# Altium PCB 23972修改.PcbDoc (part 1 of 2)
Units mil, origin at the board's own origin, x right, y up, seen from the top; angles counter-clockwise.
Board outline 7085.81 x 4390 mil, 3 copper layers (Top Layer, Mid-Layer 1, Bottom Layer); 28 components, 107 nets, 1198 pads, 224 vias.
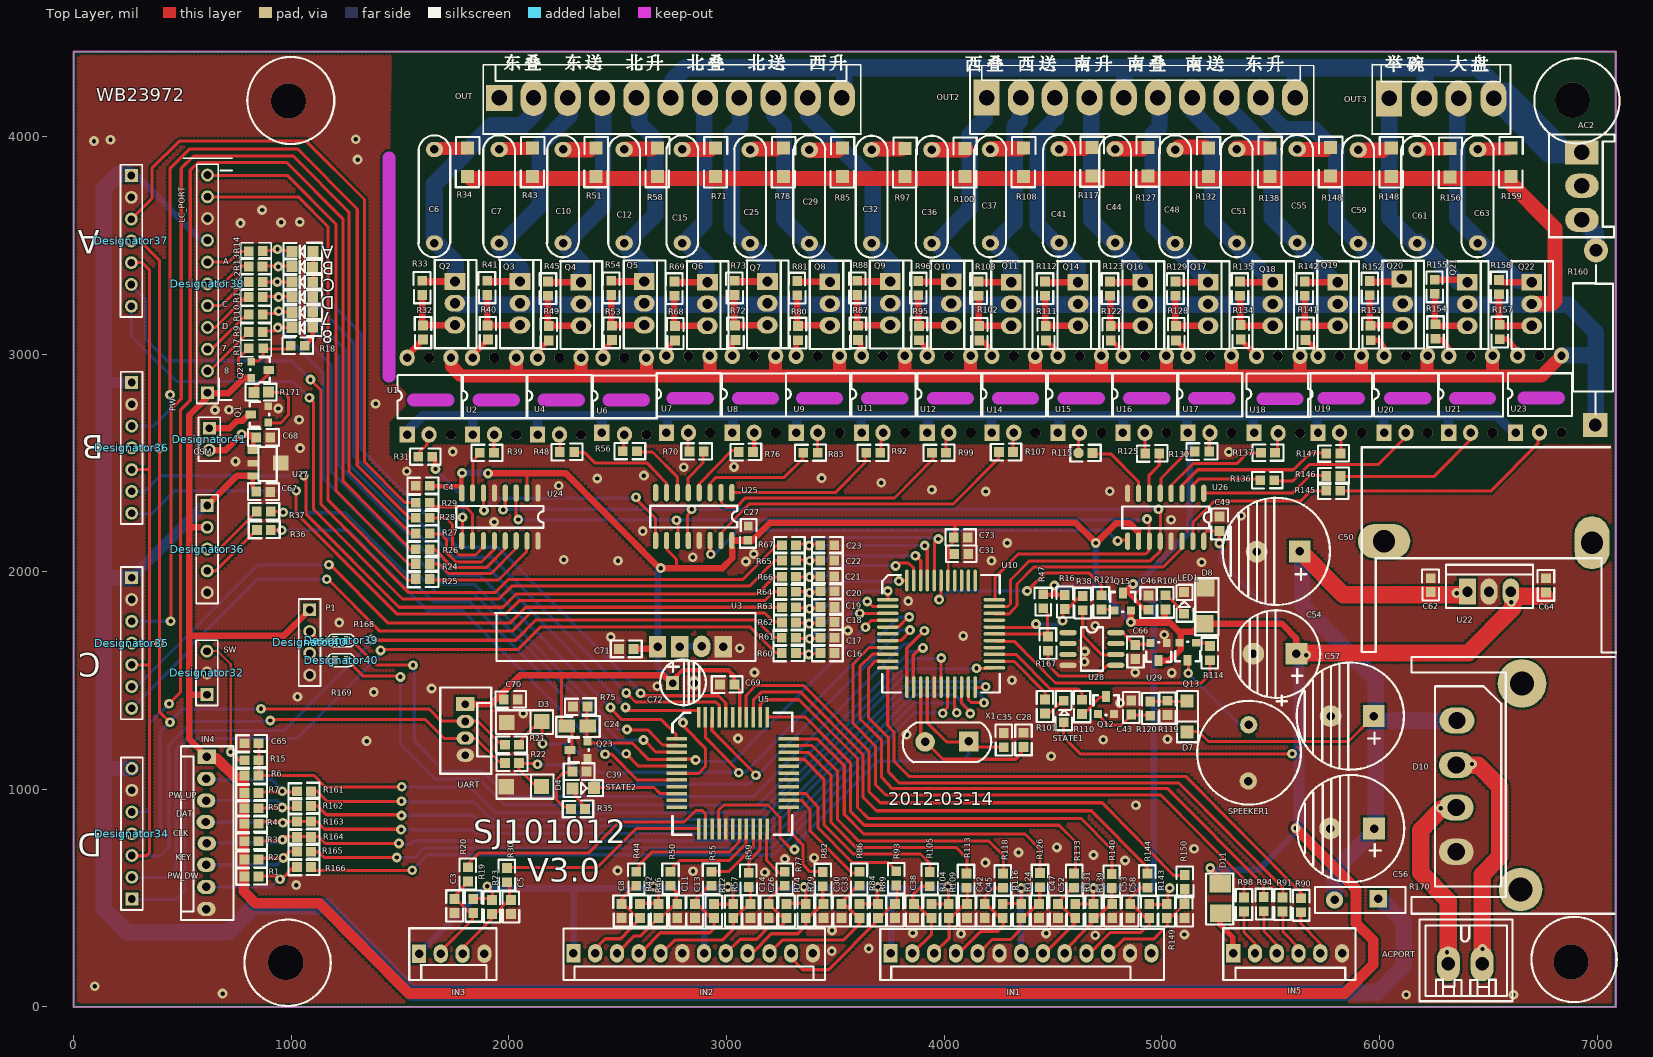
[diagram p0: Top Layer view]
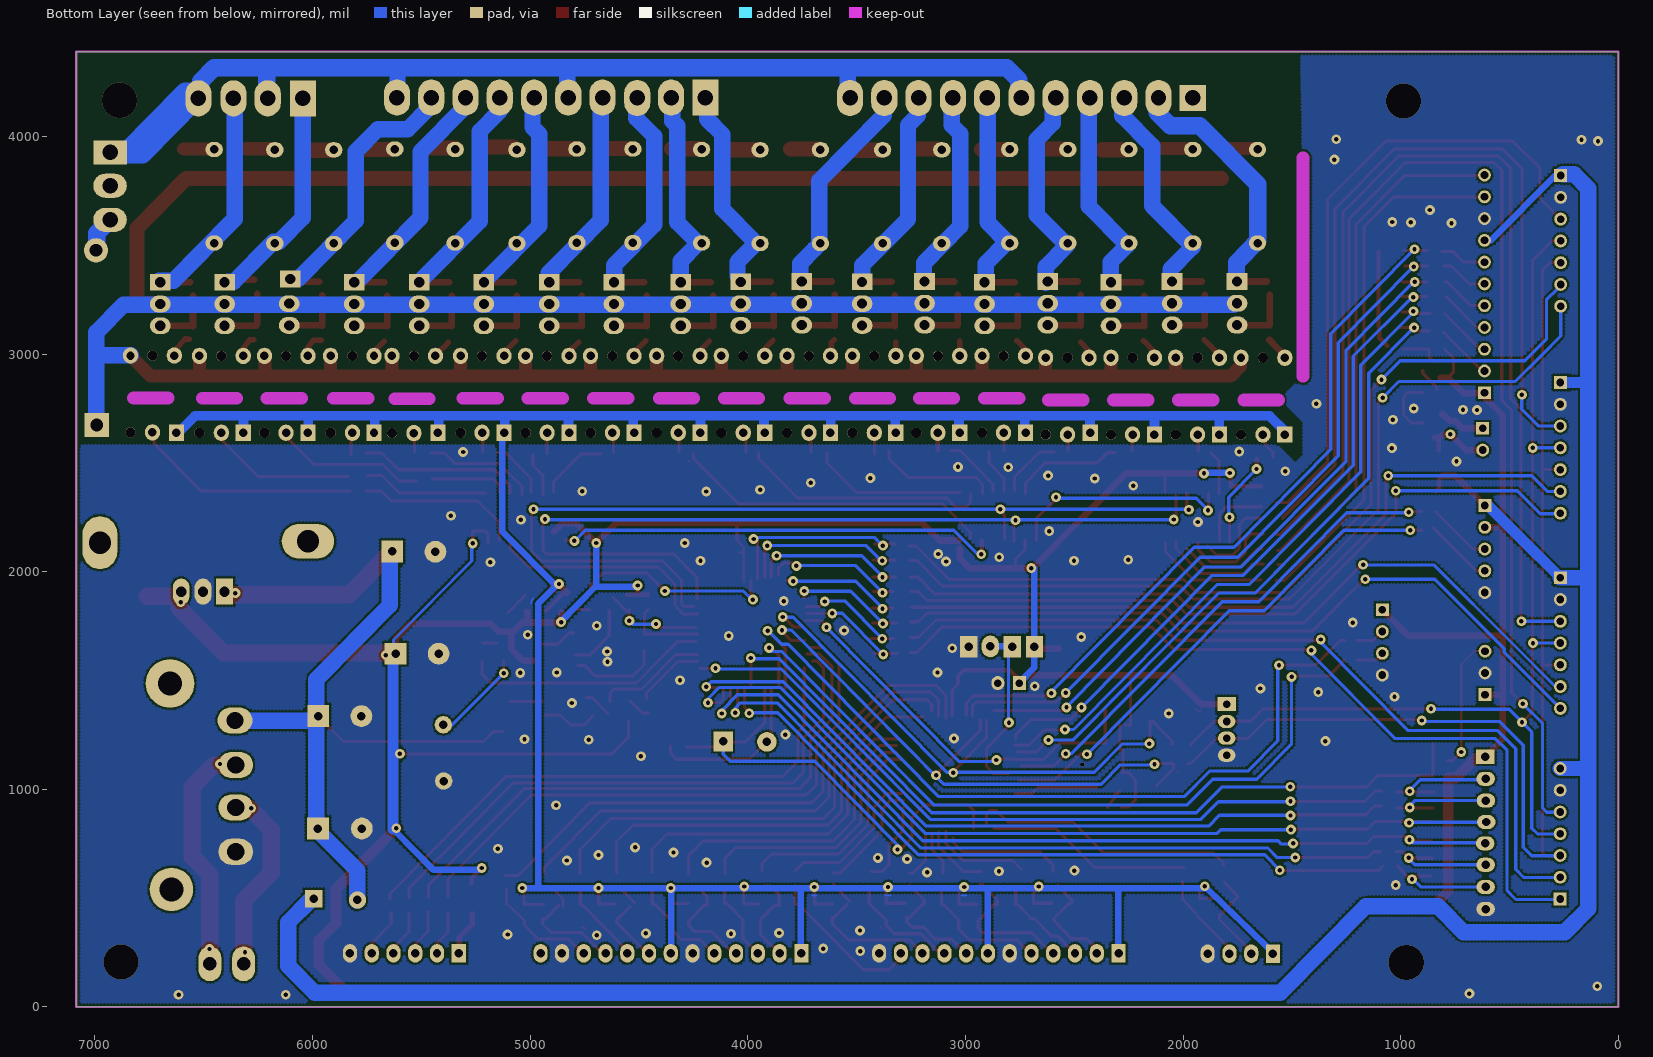
[diagram p1: Bottom Layer view, seen from below]

## Layer stack, top to bottom
Top Layer: signal copper 1.4
Dielectric: core 12.6, FR-4, Dk 4.8
Mid-Layer 1: signal copper 1.4
Dielectric: prepreg 12.6, FR-4, Dk 4.8
Bottom Layer: signal copper 1.4

## Board outline
0,0 7085.81,0 7085.81,4390 0,4390

## Design rules (kind name [scope] priority, off if disabled: settings)
Clearance [All] p1: gap=9
PlaneClearance [All] p1: clearance=10
PolygonConnect [All] p1: connectstyle=Direct reliefconductorwidth=10 reliefentries=4 polygonreliefangle="90 Angle"
RoutingLayers [All] p1: top layer_v5=TRUE mid layer 1_v5=FALSE bottom layer_v5=TRUE
RoutingVias [All] p1: holewidth=28 width=50 viastyle="Through Hole" minholewidth=28 minwidth=50 maxholewidth=28 maxwidth=50
SilkscreenOverComponentPads [All] p1: minsilkscreentomaskgap=10
SolderMaskExpansion [All] p1: expansion=4
Width [All] p1: maxlimit=100 minlimit=8 preferedwidth=15
25 further rules are at their usual default settings.

## Components (designator, comment, footprint, x,y, rotation, side; value= is the part's Value field where it differs from the comment)
Designator32 "Comment" HDR1X3 613,1435 r90 top
Designator34 "Comment" HDR1X7 268,496 r90 top
Designator35 "Comment" HDR1X7 267,1972 r270 top
Designator36 "Comment" HDR1X7 267,2869 r270 top
Designator36 "Comment" HDR1X5 614,2304 r270 top
Designator37 "Comment" HDR1X7 265.68,3820 r270 top
Designator38 "Comment" HDR1X11 615.51,2822.4 r90 top
Designator39 "Comment" 0603R 1257.12,1684 r180 top
Designator40 "Comment" 0603R 1257.12,1594 r180 top
Designator40 "Comment" HDR1X4 1085,1825 r270 top
Designator41 "Comment" HDR1X2 624,2659 r270 top
? "" A 7085.81,4390 r270 top
? "" A 7085.81,0 r180 top
? "" A 0,0 r90 top
? "" A 0,4390 r0 top
? "" SOT-23#1 4706.27,1346.67 r0 top
? "" SOT-23#2 4783.83,1821.67 r0 top
? "" SOT-23#3 5023.1,1671.67 r180 top
? "" SOT-23#4 5156.77,1673.33 r180 top
? "" SOT-23#5 2361.39,1143.33 r90 top
? "" SOT-23#6 894.39,2685 r90 top
? "" SOT-23#7 816.83,2965 r270 top
? "" SO-16#1 2133.66,2361.67 r270 top
? "" SO-16#2 3024.75,2363.33 r270 top
? "" SO-16#3 5193.07,2360 r270 top
? "" SO-8 4569.31,1720 r0 top
? "" QFP44 3740.92,1871.67 r0 top
? "" QFP44-3 2772.28,1231.67 r0 top

## Footprints (in the part's own frame and the unit in brackets; to place one, negate y for a bottom-side part, rotate by r counter-clockwise, add the part's x,y. Pads: shape width x height; smd on the part's side, far side on the other; paste and mask are expansions set on the pad)
0603R [mm]
  rect 0.7x1 smd: 1(0,0) 2(1.4,0)
  silkscreen extent -0.9,-0.75 2.3,0.75, body extent 0,-0.4 1.6,0.4, height 0.3
A [mil]
  Keep-Out Layer lines w10: 0,-16 0,0 16,0
HDR1X2 [mm] "Connector; Header; 2 Position"
  rect 1.5x1.5 hole 0.9: 1(0,0)
  round 1.5 hole 0.9: 2(2.54,0)
  silkscreen extent -1.27,-1.27 3.81,1.27
HDR1X3 [mm] "Connector; Header; 3 Position"
  rect 1.5x1.5 hole 0.9: 1(0,0)
  round 1.5 hole 0.9: 2(2.54,0) 3(5.08,0)
  silkscreen extent -1.27,-1.27 6.35,1.27
HDR1X4 [mm] "Connector; Header; 4 Position"
  rect 1.5x1.5 hole 0.9: 1(0,0)
  round 1.5 hole 0.9: 2(2.54,0) 3(5.08,0) 4(7.62,0)
  silkscreen extent -1.27,-1.27 8.89,1.27
HDR1X5 [mm] "Connector; Header; 5 Position"
  rect 1.5x1.5 hole 0.9: 1(0,0)
  round 1.5 hole 0.9: 2(2.54,0) 3(5.08,0) 4(7.62,0) 5(10.16,0)
  silkscreen extent -1.27,-1.27 11.43,1.27
HDR1X7 [mm] "Connector; Header; 7 Position"
  rect 1.5x1.5 hole 0.9: 1(0,0)
  round 1.5 hole 0.9: 2(2.54,0) 3(5.08,0) 4(7.62,0) 5(10.16,0) 6(12.7,0) 7(15.24,0)
  silkscreen extent -1.27,-1.27 16.51,1.27
HDR1X11 [mm] "Connector; Header; 11 Position"
  rect 1.5x1.5 hole 0.9: 1(0,0)
  round 1.5 hole 0.9: 2(2.54,0) 3(5.08,0) 4(7.62,0) 5(10.16,0) 6(12.7,0) 7(15.24,0) 8(17.78,0) 9(20.32,0) 10(22.86,0) 11(25.4,0)
  silkscreen extent -1.27,-1.27 26.67,1.27
QFP44 [mil]
  oval 100x16 smd: 45(490,0) 46(490,-31) 47(490,-63) 48(490,-94) 49(490,-126) 50(490,-157) 51(490,-188) 52(490,-220) 53(490,-251) 54(490,-283) 55(490,-314) 67(0,-314) 68(0,-283) 69(0,-251) 70(0,-220) 71(0,-188) 72(0,-157) 73(0,-126) 74(0,-94) 75(0,-63) 76(0,-31) 77(0,0)
  oval 16x100 smd: 56(402,-402) 57(371,-402) 58(339,-402) 59(308,-402) 60(276,-402) 61(245,-402) 62(214,-402) 63(182,-402) 64(151,-402) 65(119,-402) 66(88,-402) 78(88,88) 79(119,88) 80(151,88) 81(182,88) 82(214,88) 83(245,88) 84(276,88) 85(308,88) 86(339,88) 87(371,88) 88(402,88)
  silkscreen extent -25,-427 515,113
QFP44-3 [mil]
  rect 16x95 smd: 1(100,100) 2(131,100) 3(162,100) 4(194,100) 5(225,100) 6(257,100) 7(288,100) 8(319,100) 9(351,100) 10(382,100) 11(414,100) 23(414,-414) 24(382,-414) 25(351,-414) 26(319,-414) 27(288,-414) 28(257,-414) 29(225,-414) 30(194,-414) 31(162,-414) 32(131,-414) 33(100,-414)
  rect 95x16 smd: 12(514,0) 13(514,-31) 14(514,-62) 15(514,-94) 16(514,-125) 17(514,-157) 18(514,-188) 19(514,-219) 20(514,-251) 21(514,-282) 22(514,-314) 34(0,-314) 35(0,-282) 36(0,-251) 37(0,-219) 38(0,-188) 39(0,-157) 40(0,-125) 41(0,-94) 42(0,-62) 43(0,-31) 44(0,0)
  silkscreen extent -20,-440 530,120
SO-8 [mil]
  oval 80x24 smd: 89(220,0) 90(220,-50) 91(220,-100) 92(220,-150) 93(0,-150) 94(0,-100) 95(0,-50) 96(0,0)
  silkscreen extent 60,-175 160,25
SO-16#1 [mil]
  oval 80x24 smd: 129(220,0) 130(220,-50) 131(220,-100) 132(220,-150) 133(220,-200) 134(220,-250) 135(220,-300) 136(220,-350) 137(0,-350) 138(0,-300) 139(0,-250) 140(0,-200) 141(0,-150) 142(0,-100) 143(0,-50) 144(0,0)
  silkscreen extent 60,-375 160,25
SO-16#2 [mil]
  oval 80x24 smd: 113(220,0) 114(220,-50) 115(220,-100) 116(220,-150) 117(220,-200) 118(220,-250) 119(220,-300) 120(220,-350) 121(0,-350) 122(0,-300) 123(0,-250) 124(0,-200) 125(0,-150) 126(0,-100) 127(0,-50) 128(0,0)
  silkscreen extent 60,-375 160,25
SO-16#3 [mil]
  oval 80x24 smd: 97(220,0) 98(220,-50) 99(220,-100) 100(220,-150) 101(220,-200) 102(220,-250) 103(220,-300) 104(220,-350) 105(0,-350) 106(0,-300) 107(0,-250) 108(0,-200) 109(0,-150) 110(0,-100) 111(0,-50) 112(0,0)
  silkscreen extent 60,-375 160,25
SOT-23#1 [mil]
  rect 36x50 smd: 163(38,80)
  rect 36x36 smd: 164(75,0) 165(0,0)
  silkscreen extent -20,-5 95,85
SOT-23#2 [mil]
  rect 36x50 smd: 160(38,80)
  rect 36x36 smd: 161(75,0) 162(0,0)
  silkscreen extent -20,-5 95,85
SOT-23#3 [mil]
  rect 36x50 smd: 157(38,80)
  rect 36x36 smd: 158(75,0) 159(0,0)
  silkscreen extent -20,-5 95,85
SOT-23#4 [mil]
  rect 36x50 smd: 154(38,80)
  rect 36x36 smd: 155(75,0) 156(0,0)
  silkscreen extent -20,-5 95,85
SOT-23#5 [mil]
  rect 36x50 smd: 151(38,80)
  rect 36x36 smd: 152(75,0) 153(0,0)
  silkscreen extent -20,-5 95,85
SOT-23#6 [mil]
  rect 36x50 smd: 148(38,80)
  rect 36x36 smd: 149(75,0) 150(0,0)
  silkscreen extent -20,-5 95,85
SOT-23#7 [mil]
  rect 36x50 smd: 145(38,80)
  rect 36x36 smd: 146(75,0) 147(0,0)
  silkscreen extent -20,-5 95,85

## Free pads (board coordinates)
  round 10 all layers, no hole: 0(94.06,3978.33) 0(97.36,95) 0(169.97,3985) 0(684.82,61.67) 0(722.77,1171.67) 0(767.33,3601.67) 0(772.28,2631.67) 0(861.39,1370) 0(866.34,3661.67) 0(904.29,1316.67) 0(935.64,3331.67) 0(937.29,3481.67) 0(938.94,3121.67) 0(940.59,2758.33) 0(940.59,3401.67) 0(942.24,3196.67) 0(942.24,3261.67) 0(948.84,586.67) 0(953.8,3605) 0(957.1,2190) 0(958.75,916.67) 0(958.75,991.67) 0(960.4,768.33) 0(962.05,846.67) 0(963.7,685) 0(963.7,2273.33) 0(1023.1,560) 0(1036.3,2698.33) 0(1039.6,3606.67) 0(1163.37,1965) 0(1173.27,2031.67) 0(1297.03,3986.67) 0(1305.28,3893.33) 0(1346.53,1221.67) 0(1367.99,1688.33) 0(1379.54,1446.67) 0(1387.79,2771.67) 0(1410.89,1638.33) 0(1485.15,686.67) 0(1495.05,751.67) 0(1501.65,1516.67) 0(1504.95,815) 0(1506.6,880) 0(1506.6,945) 0(1508.25,1011.67) 0(1531.35,2461.67) 0(1556.11,628.33) 0(1559.41,1570) 0(1645.22,1463.33) 0(1663.37,2471.67) 0(1742.57,2551.67) 0(1785.48,2453.33) 0(1787.13,2250) 0(1886.14,2281.67) 0(1900.99,555) 0(1904.29,2451.67) 0(1932.34,2228.33) 0(1973.6,2285) 0(2042.9,2240) 0(2066.01,1348.33) 0(2132.01,1115) 0(2155.12,1210) 0(2229.37,2395) 0(2252.47,2055) 0(2405.94,2428.33) 0(2442.24,1161.67) 0(2467,1376.67) 0(2468.65,1700) 0(2500,626.67) 0(2501.65,2050) 0(2536.3,1376.67) 0(2539.6,1163.33) 0(2539.6,1443.33) 0(2542.9,1275) 0(2584.16,2341.67) 0(2605.61,1441.67) 0(2615.51,2186.67) 0(2618.81,1226.67) 0(2620.46,2441.67) 0(2663.37,553.33) 0(2681.52,1473.33) 0(2698.02,2016.67) 0(2770.63,2236.67) 0(2800.33,1306.67) 0(2803.63,2480) 0(2839.93,2286.67) 0(2844.89,2066.67) 0(2846.54,623.33) 0(2858.09,1135) 0(2927.39,2080) 0(3006.6,551.67) 0(3034.65,2481.67) 0(3052.81,1233.33) 0(3056.11,1076.67) 0(3061.06,1648.33) 0(3089.11,2046.67) 0(3125.41,2081.67) 0(3128.71,1536.67) 0(3135.31,1065) 0(3176.57,618.33) 0(3268.56,680) 0(3312.71,723.75) 0(3356.44,551.67) 0(3377.89,1620) 0(3379.54,1761.67) 0(3379.54,2120) 0(3381.19,1830) 0(3381.19,1903.33) 0(3381.19,1975) 0(3382.84,1691.67) 0(3382.84,2050) 0(3402.64,685) 0(3437.29,2430) 0(3483.5,256.67) 0(3485.15,351.67) 0(3557.76,1730) 0(3612.21,1808.33) 0(3638.61,1745) 0(3646.86,1863.33) 0(3653.47,268.33) 0(3694.72,551.67) 0(3711.22,2408.33) 0(3740.92,1911.67) 0(3777.23,2026.67) 0(3792.08,1956.67) 0(3827.69,1251.67) 0(3834.98,1865) 0(3839.93,1791.67) 0(3843.23,1731.67) 0(3856.44,340) 0(3867.99,2073.33) 0(3902.64,1650) 0(3909.24,1728.33) 0(3910.89,2120) 0(3943.89,2376.67) 0(3973.6,2150) 0(3976.9,1871.67) 0(3986.8,1603.33) 0(3993.4,1350) 0(4016.5,553.33) 0(4057.76,1351.67) 0(4077.56,336.67) 0(4087.46,1705) 0(4120.46,1348.33) 0(4148.52,1556.67) 0(4183.17,1398.33) 0(4189.77,663.33) 0(4191.42,1471.67) 0(4191.42,2368.33) 0(4217.82,2050) 0(4290.43,2131.67) 0(4311.88,1501.67) 0(4341.58,710) 0(4354.79,546.67) 0(4381.19,1911.67) 0(4422.44,1760) 0(4468.65,338.33) 0(4491.75,1151.67) 0(4506.6,1936.67) 0(4518.15,733.33) 0(4544.56,1775) 0(4645.22,1586.67) 0(4646.86,1633.33) 0(4686.47,546.67) 0(4686.47,698.33) 0(4694.72,330) 0(4694.72,1751.67) 0(4696.37,2131.67) 0(4731.02,1228.33) 0(4760.73,2370) 0(4797.03,2141.67) 0(4808.58,1396.67) 0(4831.68,673.33) 0(4858.09,1768.33) 0(4867.99,1943.33) 0(4877.89,1536.67) 0(4881.19,926.67) 0(4932.34,2241.67) 0(4985.15,2286.67) 0(5011.55,1710) 0(5026.4,1230) 0(5036.3,546.67) 0(5042.9,2238.33) 0(5046.2,1535) 0(5103.96,333.33) 0(5122.11,1533.33) 0(5148.52,726.67) 0(5183.17,2043.33) 0(5222.77,638.33) 0(5264.03,2130) 0(5308.58,2550) 0(5364.69,2256.67) 0(5599.01,1163.33) 0(5615.51,821.67) 0(5663.37,1616.67) 0(6123.76,56.67) 0(6282.18,913.33) 0(6310.23,251.67) 0(6354.78,1901.67) 0(6425.74,1116.67) 0(6473.6,266.67) 0(6605.61,1860) 0(6615.51,56.67)
  round 161.42 on Top Solder: 0(975.25,203.33) 0(986.8,4163.33) 0(6881.19,206.67) 0(6887.79,4166.67)
  round 161.42 on Bottom Solder: 0(975.25,203.33) 0(986.8,4163.33) 0(6881.19,206.67) 0(6887.79,4166.67)
  rect 45x45 smd: 166(2009.9,426.67) 167(4110.56,2081.67) 168(4108.91,2156.67) 169(4554.46,1893.33) 170(4636.96,1888.33) 171(4722.77,1891.67) 172(4938.94,1890) 173(5016.5,1891.67) 174(4476.9,1701.67) 175(5221.12,1658.33) 176(4877.89,1663.33) 177(5026.4,1406.67) 178(4947.19,1403.33) 179(4859.74,1408.33) 180(4633.66,1411.67) 181(4463.7,1413.33) 182(4364.69,1260) 183(4273.93,1258.33) 184(2009.9,491.67) 185(1922.44,491.67) 186(1836.63,496.67) 187(1750.83,496.67) 188(2518.15,473.33) 189(2602.31,473.33) 190(2688.12,473.33) 191(2773.93,473.33) 192(2854.79,473.33) 193(3031.35,473.33) 194(2942.24,473.33) 195(3110.56,473.33) 196(3194.72,473.33) 197(3275.58,473.33) 198(3364.69,473.33) 199(3445.55,473.33) 200(3528.05,473.33) 201(3610.56,473.33) 202(3696.37,473.33) 203(3773.93,473.33) 204(3861.39,473.33) 205(3942.24,473.33) 206(4021.45,473.33) 207(4105.61,473.33) 208(4186.47,473.33) 209(4268.98,473.33) 210(4354.79,473.33) 211(4435.64,473.33) 212(4523.1,473.33) 213(4602.31,473.33) 214(4686.47,473.33) 215(4772.28,473.33) 216(4854.79,473.33) 217(4942.24,473.33) 218(5023.1,473.33) 219(5103.96,473.33) 220(5640.26,500) 221(5554.45,503.33) 222(5468.65,505) 223(5377.89,503.33) 224(5105.61,606.67) 225(4933.99,613.33) 226(4770.63,611.67) 227(4597.36,613.33) 228(4440.59,615) 229(4270.63,613.33) 230(4102.31,613.33) 231(3933.99,620) 232(3780.53,623.33) 233(3610.56,621.67) 234(3442.24,620) 235(3267.33,621.67) 236(3102.31,616.67) 237(2930.69,621.67) 238(2742.57,621.67) 239(2585.81,621.67) 240(1991.75,638.33) 241(1811.88,641.67) 242(2046.2,1121.67) 243(2046.2,1205) 244(2349.84,910) 245(2356.44,1081.67) 246(2361.39,1380) 247(2041.25,1413.33) 248(1090.76,643.33) 249(1090.76,713.33) 250(1090.76,781.67) 251(1090.76,851.67) 252(1090.76,923.33) 253(1090.76,991.67) 254(849.83,600) 255(849.83,678.33) 256(849.83,761.67) 257(849.83,841.67) 258(849.83,913.33) 259(849.83,983.33) 260(849.83,1063.33) 261(849.83,1133.33) 262(849.83,1211.67) 263(3036.3,1481.67) 264(3320.13,1626.67) 265(3320.13,1696.67) 266(3320.13,1766.67) 267(3320.13,1836.67) 268(3320.13,1908.33) 269(3320.13,1976.67) 270(3320.13,2051.67) 271(3496.7,1626.67) 272(3496.7,1696.67) 273(3496.7,1768.33) 274(3496.7,1838.33) 275(3496.7,1910) 276(3495.05,1978.33) 277(3495.05,2051.67) 278(3495.05,2121.67) 279(3320.13,2121.67) 280(1636.96,1966.67) 281(1636.96,2035) 282(1636.96,2103.33) 283(1636.96,2175) 284(1636.96,2248.33) 285(1636.96,2316.67) 286(1636.96,2395) 287(5516.5,2420) 288(5820.13,2371.67) 289(5821.78,2440) 290(5821.78,2543.33) 291(5519.8,2546.67) 292(5217.82,2551.67) 293(4988.45,2543.33) 294(4681.52,2545) 295(4316.83,2550) 296(4008.25,2546.67) 297(3706.27,2546.67) 298(3419.14,2546.67) 299(3122.11,2550) 300(2896.04,2551.67) 301(2589.11,2553.33) 302(2300.33,2550) 303(1932.34,2546.67) 304(1648.51,2528.33) 313(1062.71,3038.33) 314(871.29,3026.67) 315(869.64,3101.67) 316(869.64,3181.67) 317(869.64,3261.67) 318(869.64,3331.67) 319(1602.31,3271.67) 320(6552.81,3135) 321(6552.81,3068.33) 322(6549.51,3275) 323(6549.51,3340) 324(6257.43,3136.67) 325(6257.43,3070) 326(6254.12,3276.67) 327(6254.12,3341.67) 328(5958.75,3130) 329(5960.4,3063.33) 330(5955.45,3270) 331(5955.45,3335) 332(5660.07,3131.67) 333(5660.07,3065) 334(5656.77,3268.33) 335(5656.77,3333.33) 336(5363.04,3133.33) 337(5363.04,3066.67) 338(5359.74,3268.33) 339(5359.74,3333.33) 340(5066.01,3128.33) 341(5066.01,3061.67) 342(5062.71,3268.33) 343(5062.71,3333.33) 344(4765.68,3128.33) 345(4765.68,3061.67) 346(4762.38,3268.33) 347(4762.38,3333.33) 348(4467,3128.33) 349(4468.65,3061.67) 350(4463.7,3268.33) 351(4463.7,3333.33) 352(4161.72,3128.33) 353(4161.72,3061.67) 354(4158.42,3268.33) 355(4158.42,3333.33) 356(3884.49,3128.33) 357(3884.49,3063.33) 358(3881.19,3270) 359(3881.19,3335) 360(3603.96,3130) 361(3603.96,3065) 362(3600.66,3271.67) 363(3600.66,3336.67) 364(3328.38,3128.33) 365(3328.38,3063.33) 366(3325.08,3270) 367(3325.08,3335) 368(3039.6,3131.67) 369(3041.25,3065) 370(3036.3,3271.67) 371(3036.3,3336.67) 372(2764.03,3128.33) 373(2764.03,3061.67) 374(2760.73,3268.33) 375(2760.73,3333.33) 376(2473.6,3130) 377(2473.6,3065) 378(2470.3,3271.67) 379(2470.3,3336.67) 380(2183.17,3128.33) 381(2183.17,3061.67) 382(2179.87,3268.33) 383(2179.87,3333.33) 384(1902.64,3131.67) 385(1904.29,3066.67) 386(1900.99,3271.67) 387(1900.99,3336.67) 437(4476.9,1636.67) 438(2970.3,1481.67) 439(1981.85,1121.67) 440(1981.85,1205) 441(1976.9,1413.33) 442(2295.38,1380) 443(2292.08,1081.67) 444(2285.48,910) 445(5103.96,408.33) 446(5023.1,408.33) 447(4942.24,408.33) 448(4854.79,408.33) 449(4772.28,408.33) 450(4686.47,408.33) 451(4602.31,408.33) 452(4523.1,408.33) 453(4435.64,408.33) 454(4354.79,408.33) 455(4268.98,408.33) 456(4186.47,408.33) 457(4105.61,408.33) 458(4021.45,408.33) 459(3942.24,408.33) 460(3861.39,408.33) 461(3773.93,408.33) 462(3696.37,408.33) 463(3610.56,408.33) 464(3528.05,408.33) 465(3445.55,408.33) 466(3364.69,408.33) 467(3275.58,408.33) 468(3194.72,408.33) 469(3110.56,408.33) 470(3031.35,408.33) 471(2942.24,408.33) 472(2854.79,408.33) 473(2773.93,408.33) 474(2688.12,408.33) 475(2602.31,408.33) 476(2518.15,408.33) 477(5640.26,435) 478(5554.45,438.33) 479(5468.65,440) 480(5377.89,438.33) 481(5105.61,541.67) 482(4933.99,548.33) 483(4770.63,546.67) 484(4597.36,548.33) 485(4440.59,550) 486(4270.63,548.33) 487(4102.31,548.33) 488(3933.99,555) 489(3780.53,558.33) 490(3610.56,556.67) 491(3442.24,555) 492(3267.33,556.67) 493(3102.31,551.67) 494(2930.69,556.67) 495(2742.57,556.67) 496(2585.81,556.67) 497(4364.69,1195) 498(4273.93,1193.33) 499(4549.51,1406.67) 500(4549.51,1308.33) 501(4463.7,1348.33) 502(4633.66,1346.67) 503(4859.74,1343.33) 504(4947.19,1338.33) 505(5026.4,1341.67) 506(5102.31,1906.67) 507(5102.31,1806.67) 508(5221.12,1593.33) 509(4877.89,1598.33) 510(5016.5,1826.67) 511(4938.94,1825) 512(4722.77,1826.67) 513(4636.96,1823.33) 514(4554.46,1828.33) 515(4455.45,1831.67) 516(4455.45,1896.67) 517(5265.68,2186.67) 518(5265.68,2253.33) 519(4046.2,2081.67) 520(4044.56,2156.67) 521(3430.69,2121.67) 522(3430.69,2051.67) 523(3430.69,1978.33) 524(3432.34,1910) 525(3432.34,1838.33) 526(3432.34,1768.33) 527(3432.34,1696.67) 528(3432.34,1626.67) 529(3254.13,1626.67) 530(3254.13,1696.67) 531(3255.78,1766.67) 532(3255.78,1836.67) 533(3255.78,1908.33) 534(3255.78,1976.67) 535(3255.78,2051.67) 536(3255.78,2121.67) 537(2506.6,1645) 538(2572.61,1645) 539(1572.61,1966.67) 540(1572.61,2035) 541(1572.61,2103.33) 542(1572.61,2175) 543(1572.61,2248.33) 544(1572.61,2316.67) 545(1572.61,2395) 546(6765.68,1905) 547(6765.68,1970) 548(6235.97,1906.67) 549(6235.97,1970) 550(5755.78,2371.67) 551(5755.78,2440) 552(5452.15,2420) 553(5755.78,2543.33) 554(5455.45,2546.67) 555(5151.82,2551.67) 556(4924.09,2543.33) 558(4252.48,2550) 559(3943.89,2546.67) 560(3641.91,2546.67) 561(3353.14,2546.67) 562(3056.11,2550) 563(2830.03,2551.67) 564(2523.1,2553.33) 565(2234.32,2550) 566(1866.34,2546.67) 567(1584.16,2528.33) 568(1811.88,576.67) 569(1991.75,573.33) 570(1922.44,426.67) 571(1836.63,431.67) 572(1750.83,431.67) 573(1026.4,643.33) 574(1026.4,713.33) 575(1026.4,781.67) 576(1026.4,851.67) 577(1026.4,923.33) 578(1026.4,991.67) 579(785.48,600) 580(785.48,678.33) 581(785.48,761.67) 582(785.48,841.67) 583(785.48,913.33) 584(785.48,983.33) 585(785.48,1063.33) 586(785.48,1133.33) 587(785.48,1211.67) 590(998.35,3038.33) 591(839.93,2616.67) 592(904.29,2616.67) 593(843.24,2191.67) 594(905.94,2191.67) 595(841.58,2276.67) 596(905.94,2276.67) 597(839.93,2368.33) 598(904.29,2366.67) 607(867.99,3401.67) 608(869.64,3473.33) 609(805.28,3026.67) 610(805.28,3101.67) 611(805.28,3181.67) 612(805.28,3261.67) 613(805.28,3261.67) 614(805.28,3331.67) 615(805.28,3401.67) 616(805.28,3471.67) 617(1605.61,3131.67) 618(1605.61,3066.67) 619(1602.31,3336.67)
  rect 50x50 smd: 307(1099.01,3330) 308(1097.36,3398.33) 309(1100.66,3471.67) 599(896.04,2825) 600(830.03,2823.33) 601(1003.3,3121.67) 602(1003.3,3191.67) 603(1003.3,3261.67) 604(1003.3,3331.67) 605(1003.3,3401.67) 606(1003.3,3471.67) 622(1099.01,3261.67) 623(1099.01,3193.33) 624(1099.01,3123.33)
  rect 50x31 smd: 310(823.43,2440) 311(825.08,2498.33) 312(825.08,2556.67)
  rect 60x60 smd: 388(6603.96,3816.67) 389(6603.96,3946.67) 390(6325.08,3813.33) 391(6325.08,3945) 392(6054.45,3815) 393(6054.45,3946.67) 394(5775.58,3818.33) 395(5775.58,3948.33) 396(5496.7,3816.67) 397(5496.7,3946.67) 398(5214.52,3815) 399(5214.52,3946.67) 400(4937.29,3818.33) 401(4937.29,3948.33) 402(4679.87,3818.33) 403(4679.87,3948.33) 404(4364.69,3816.67) 405(4364.69,3946.67) 406(4095.71,3815) 407(4095.71,3945) 408(3820.13,3815) 409(3820.13,3945) 410(3533,3815) 411(3533,3946.67) 412(3262.38,3815) 413(3262.38,3946.67) 414(2948.85,3816.67) 415(2948.85,3946.67) 416(2683.17,3816.67) 417(2683.17,3946.67) 418(2400.99,3816.67) 419(2400.99,3946.67) 420(2108.91,3816.67) 421(2108.91,3946.67) 430(5115.51,1405) 431(5115.51,1263.33) 620(1810.23,3816.67) 621(1810.23,3946.67)
  rect 100x80 smd: 422(5268.98,566.67) 423(5270.63,431.67)
  rect 55x55 smd: 424(2391.09,1006.67) 425(2292.08,1003.33)
  rect 75x60 smd: 426(2363.04,1291.67) 427(2265.68,1291.67)
  rect 80x80 smd: 428(5202.97,1926.67) 429(5198.02,1761.67)
  rect 70x70 smd: 432(952.14,2500) 433(2151.82,1311.67) 434(1990.1,1306.67) 435(2150.16,1013.33) 436(1988.45,1011.67)
  oct 45x45 smd: 557(4617.16,2545)
  rect 40x40 smd: 625(3097.36,2145) 626(3100.66,2210)
  round 47 hole 47: 627(6836.63,2640) 628(6735.97,2993.33) 632(6519.8,2638.33) 633(6419.14,2991.67) 637(6221.12,2638.33) 638(6122.11,2991.67) 642(5917.49,2638.33) 643(5816.83,2991.67) 647(5635.31,2636.67) 648(5534.65,2991.67) 652(5320.13,2638.33) 653(5221.12,2991.67) 657(5021.45,2638.33) 658(4922.44,2991.67) 662(4722.77,2638.33) 663(4622.11,2991.67) 667(4419.14,2638.33) 668(4320.13,2991.67) 672(4122.11,2638.33) 673(4021.45,2991.67) 678(3820.13,2638.33) 679(3719.47,2991.67) 683(3519.8,2638.33) 684(3419.14,2991.67) 688(3226.07,2638.33) 689(3127.06,2991.67) 693(2924.09,2638.33) 694(2825.08,2991.67) 698(2632.01,2630) 699(2531.35,2983.33) 703(2331.68,2630) 704(2232.67,2983.33) 708(2034.65,2630) 709(1933.99,2983.33) 764(1734.32,2630) 765(1633.66,2983.33)
  oval 70x75 hole 39: 629(6735.97,2640) 630(6836.63,2993.33) 631(6635.31,2993.33) 634(6419.14,2638.33) 635(6519.8,2991.67) 636(6318.48,2991.67) 639(6122.11,2638.33) 640(6221.12,2991.67) 641(6021.45,2991.67) 644(5816.83,2638.33) 645(5917.49,2991.67) 646(5717.82,2991.67) 649(5534.65,2636.67) 650(5635.31,2991.67) 651(5435.64,2991.67) 654(5221.12,2638.33) 655(5320.13,2991.67) 656(5120.46,2991.67) 659(4922.44,2638.33) 660(5021.45,2991.67) 661(4821.78,2991.67) 664(4622.11,2638.33) 665(4722.77,2991.67) 666(4523.1,2991.67) 669(4320.13,2638.33) 670(4419.14,2991.67) 671(4219.47,2991.67) 674(4021.45,2638.33) 675(4122.11,2991.67) 676(3922.44,2991.67) 680(3719.47,2638.33) 681(3820.13,2991.67) 682(3620.46,2991.67) 685(3419.14,2638.33) 686(3519.8,2991.67) 687(3320.13,2991.67) 690(3127.06,2638.33) 691(3226.07,2991.67) 692(3026.4,2991.67) 695(2825.08,2638.33) 696(2924.09,2991.67) 697(2724.42,2991.67) 700(2531.35,2630) 701(2632.01,2983.33) 702(2432.34,2983.33) 705(2232.67,2630) 706(2331.68,2983.33) 707(2132.01,2983.33) 710(1933.99,2630) 711(2034.65,2983.33) 712(1833.33,2983.33) 946(1633.66,2630) 947(1734.32,2983.33) 948(1533,2983.33)
  rect 70x75 hole 39: 677(3922.44,2638.33) 743(1833.33,2630) 744(2132.01,2630) 745(2427.39,2638.33) 746(2724.42,2638.33) 747(3026.4,2638.33) 748(3320.13,2638.33) 749(3620.46,2638.33) 750(4219.47,2638.33) 751(4523.1,2638.33) 752(4821.78,2638.33) 753(5120.46,2638.33) 754(5424.09,2638.33) 755(5717.82,2638.33) 756(6021.45,2638.33) 757(6318.48,2638.33) 758(6625.41,2638.33) 945(1533,2630)
  oval 95x77 hole 47: 713(6699.67,3130) 714(6699.67,3230) 715(6404.29,3130) 716(6404.29,3230) 717(6107.26,3131.67) 718(6107.26,3231.67) 719(5808.58,3130) 720(5808.58,3230) 721(5509.9,3130) 722(5509.9,3230) 723(5212.87,3130) 724(5212.87,3230) 725(4912.54,3130) 726(4912.54,3230) 727(4615.51,3130) 728(4615.51,3230) 729(4308.58,3130) 730(4308.58,3230) 731(4033,3131.67) 732(4033,3231.67) 733(3752.48,3133.33) 734(3752.48,3233.33) 735(3475.25,3131.67) 736(3475.25,3231.67) 737(3188.12,3133.33) 738(3188.12,3233.33) 739(2912.54,3130) 740(2912.54,3230) 741(2622.11,3133.33) 742(2622.11,3233.33) 759(2331.68,3130) 760(2331.68,3230) 761(2051.16,3133.33) 762(2051.16,3233.33) 968(1752.47,3133.33) 969(1752.47,3233.33)
  rect 95x77 hole 47: 763(6699.67,3330) 970(6404.29,3330) 971(6102.31,3345) 972(5808.58,3330) 973(5509.9,3330) 974(5212.87,3330) 975(4912.54,3330) 976(4615.51,3330) 977(4308.58,3330) 978(4033,3331.67) 979(3752.48,3333.33) 980(3475.25,3331.67) 981(3188.12,3333.33) 982(2912.54,3330) 983(2622.11,3333.33) 984(2331.68,3330) 985(2051.16,3333.33) 986(1752.47,3333.33)
  oval 80x70 hole 39: 766(6452.15,3510) 767(6173.27,3508.33) 768(5902.64,3508.33) 769(5622.11,3511.67) 770(5344.89,3510) 771(5061.06,3508.33) 772(4785.48,3511.67) 773(4528.05,3511.67) 774(4212.87,3510) 775(3943.89,3508.33) 776(3666.67,3508.33) 777(3381.19,3508.33) 778(3108.91,3508.33) 779(2797.03,3510) 780(2529.7,3510) 781(2249.18,3510) 782(1955.45,3510) 949(6452.15,3940) 950(6173.27,3938.33) 951(5902.64,3938.33) 952(5622.11,3941.67) 953(5344.89,3940) 954(5061.06,3938.33) 955(4785.48,3941.67) 956(4528.05,3941.67) 957(4212.87,3940) 958(3943.89,3938.33) 959(3666.67,3938.33) 960(3381.19,3938.33) 961(3108.91,3938.33) 962(2797.03,3940) 963(2529.7,3940) 964(2249.18,3940) 965(1955.45,3940) 966(1658.42,3510) 967(1658.42,3940)
  rect 120x120 hole 71: 783(1955.89,4176.67)
  rect 120x166 hole 71: 784(4195.16,4178.33) 785(6044.55,4175)
  oval 120x166 hole 71: 786(6206.27,4175) 787(6524.75,4175) 788(6363.75,4175) 789(4352.64,4178.33) 790(4508.25,4176.67) 791(4667.6,4178.33) 792(4825.08,4178.33) 793(4982.56,4178.33) 794(5140.04,4178.33) 795(5297.52,4178.33) 796(5455,4178.33) 797(5612.48,4178.33) 798(3530.69,4176.67) 799(3373.21,4176.67) 800(3215.73,4176.67) 801(3058.25,4176.67) 802(2900.77,4176.67) 803(2743.29,4176.67) 804(2113.37,4176.67) 805(2270.85,4176.67) 806(2585.81,4176.67) 807(2428.33,4176.67)
  rect 154x111 hole 71: 808(6930.69,3926.67)
  oval 154x111 hole 71: 809(6930.69,3616.67) 810(6930.69,3773.33)
  round 111 hole 59: 811(6995.05,3476.67)
  rect 111x111 hole 59: 812(6991.75,2673.33)
  rect 90x90 hole 39: 813(4113.86,1220)
  round 90 hole 39: 814(3912.54,1218.33)
  oval 60x65 hole 35: 815(2851.49,1488.33)
  rect 60x65 hole 35: 816(2752.47,1488.33)
  rect 80x100 hole 39: 817(2683.17,1655) 818(2785.48,1655) 819(2985.15,1655)
  oval 80x100 hole 39: 820(2886.14,1656.67)
  oval 160x243 hole 102.36: 821(6976.9,2133.33)
  oval 241x160 hole 102.36: 822(6021.45,2140)
  round 223 hole 110.24: 823(6655.12,1486.67)
  round 200 hole 110.24: 824(6648.52,540)
  oval 160x120 hole 79: 825(6356.44,1316.67) 826(6353.14,1111.67) 827(6353.14,916.67) 828(6353.14,713.33)
  oval 105x160 hole 62.99: 829(6316.83,198.33) 830(6471.95,198.33)
  rect 77x120 hole 47: 831(6404.29,1908.33)
  oval 77x120 hole 47: 832(6603.96,1908.33) 833(6503.3,1908.33)
  oval 85x65 hole 39: 836(610.56,1048.33) 837(608.91,948.33) 838(607.26,850) 839(612.21,751.67) 840(610.56,653.33) 841(610.56,551.67) 842(610.56,450)
  oval 80x60 hole 35: 884(1800.33,1156.67) 885(1800.33,1235) 886(1800.33,1311.67)
  oval 65x85 hole 39: 887(4952.15,246.67) 888(4854.13,246.67) 889(4754.13,246.67) 890(4654.13,246.67) 891(4554.13,246.67) 892(4454.13,246.67) 893(4354.13,246.67) 894(4254.13,246.67) 895(4154.13,246.67) 896(4054.13,246.67) 897(3954.13,246.67) 898(3854.13,246.67) 899(5828.38,246.67) 900(5728.38,246.67) 901(5628.38,246.67) 902(5528.38,246.67) 903(5428.38,246.67) 904(3397.03,246.67) 905(3297.03,246.67) 906(3198.02,246.67) 907(3097.03,246.67) 908(2997.03,246.67) 909(2897.03,246.67) 910(2797.03,246.67) 911(2697.03,246.67) 912(2597.03,246.67) 913(2497.03,246.67) 914(2397.03,246.67) 915(1887.46,245) 916(1787.46,245) 917(1687.46,245)
  rect 65x85 hole 39: 918(5328.38,246.67) 919(3754.13,246.67) 920(2297.03,246.67) 921(1587.46,245)
  rect 85x65 hole 35: 922(1800.33,1391.67)
  rect 85x65 hole 39: 924(612.21,1150)
  rect 100x100 hole 39: 933(5975.25,820) 934(5973.6,1336.67) 935(5618.81,1623.33) 936(5633.66,2093.33)
  round 100 hole 39: 937(5773.93,820) 938(5775.58,1336.67) 939(5435.64,2091.67) 940(5420.79,1623.33)
  rect 80x80 hole 39: 941(5995.05,496.67)
  round 80 hole 39: 942(5793.73,491.67) 943(5397.69,1038.33) 944(5399.34,1296.67)

## Via types
v1: diameter 45, hole 20, Top Layer to Bottom Layer, 219 vias
v2: diameter 161.42, hole 161.42, Top Layer to Bottom Layer, 4 vias
v3: diameter 20, hole 20, Top Layer to Bottom Layer, 1 vias

## Nets (pads, with @x,y where several pads share a name; then routed paths per layer and width w, separated by ;. In a path a pad name is that pad's centre, name@x,y a point inside that pad or via, vN(x,y) a via of type N, cw(c..) or ccw(c..) an arc to the next point about the centre after c; other vN are vias at no path point)
GND: 
NewNet1: 
NewNet2: ?.163 pad.502 | length 130.1
  Top Layer w14: pad.502@4643.56,1348.33 4714.52,1421.67 ?.163@4742.57,1421.67
NewNet3: ?.29 ?.62 ?.93 ?.100 ?.105 ?.116 ?.129 ?.140 ?.144 ?.149 ?.153 ?.159 ?.164 Designator32.2 Designator34.6 Designator35.2 Designator36.2@267,2769 Designator36.5@614,1904 Designator37.2 Designator38.9 Designator40.4 pad.0@94.06,3978.33 pad.0@97.36,95 pad.0@169.97,3985 pad.0@684.82,61.67 pad.0@767.33,3601.67 pad.0@866.34,3661.67 pad.0@940.59,2758.33 pad.0@953.8,3605 pad.0@1023.1,560 pad.0@1036.3,2698.33 pad.0@1039.6,3606.67 pad.0@1297.03,3986.67 pad.0@1305.28,3893.33 pad.0@1346.53,1221.67 pad.0@1379.54,1446.67 pad.0@1387.79,2771.67 pad.0@1531.35,2461.67 pad.0@1645.22,1463.33 pad.0@1742.57,2551.67 pad.0@1932.34,2228.33 pad.0@2066.01,1348.33 pad.0@2229.37,2395 pad.0@2252.47,2055 pad.0@2405.94,2428.33 pad.0@2468.65,1700 pad.0@2500,626.67 pad.0@2501.65,2050 pad.0@2615.51,2186.67 pad.0@2620.46,2441.67 pad.0@2681.52,1473.33 pad.0@2803.63,2480 pad.0@2844.89,2066.67 pad.0@2846.54,623.33 pad.0@3034.65,2481.67 pad.0@3052.81,1233.33 pad.0@3061.06,1648.33 pad.0@3089.11,2046.67 pad.0@3125.41,2081.67 pad.0@3128.71,1536.67 pad.0@3176.57,618.33 pad.0@3268.56,680 pad.0@3402.64,685 pad.0@3437.29,2430 pad.0@3483.5,256.67 pad.0@3485.15,351.67 pad.0@3557.76,1730 pad.0@3653.47,268.33 pad.0@3711.22,2408.33 pad.0@3827.69,1251.67 pad.0@3834.98,1865 pad.0@3856.44,340 pad.0@3943.89,2376.67 pad.0@4077.56,336.67 pad.0@4087.46,1705 pad.0@4189.77,663.33 pad.0@4191.42,2368.33 pad.0@4217.82,2050 pad.0@4290.43,2131.67 pad.0@4311.88,1501.67 pad.0@4341.58,710 pad.0@4468.65,338.33 pad.0@4491.75,1151.67 pad.0@4518.15,733.33 pad.0@4645.22,1586.67 pad.0@4646.86,1633.33 pad.0@4686.47,698.33 pad.0@4694.72,330 pad.0@4694.72,1751.67 pad.0@4731.02,1228.33 pad.0@4760.73,2370 pad.0@4808.58,1396.67 pad.0@4831.68,673.33 pad.0@4877.89,1536.67 pad.0@4881.19,926.67 pad.0@5011.55,1710 pad.0@5026.4,1230 pad.0@5042.9,2238.33 pad.0@5046.2,1535 pad.0@5103.96,333.33 pad.0@5148.52,726.67 pad.0@5183.17,2043.33 pad.0@5308.58,2550 pad.0@5364.69,2256.67 pad.0@6123.76,56.67 pad.0@6615.51,56.67 pad.166 pad.167 pad.168 pad.172 pad.179 pad.182 pad.183 pad.245 pad.247 pad.271 pad.272 pad.273 pad.274 pad.275 pad.276 pad.277 pad.278 pad.311 pad.428 pad.432 pad.434 pad.436 pad.438 pad.442 pad.445 pad.448 pad.449 pad.452 pad.453 pad.456 pad.457 pad.460 pad.461 pad.464 pad.465 pad.468 pad.469 pad.472 pad.473 pad.476 pad.505 pad.506 pad.509 pad.518 pad.537 pad.545 pad.547 pad.549 pad.572 pad.587 pad.592 pad.598 pad.626 pad.815 pad.819 pad.828 pad.833 pad.842 pad.884 pad.888 pad.894 pad.899 pad.904 pad.910 pad.915 pad.937 pad.938 pad.939 pad.940 pad.943 | length 305.6
  Top Layer w8.5: 2027.32,1077.94 cw(c2044.56,1095) 2024.14,1081.92 ccw(c2044.56,1095) 2027.35,1077.91 ; 3382.63,357.95 ccw(c3364.69,375) 3388.59,368.58 cw(c3364.69,375) 3382.66,357.98 ; 4268.03,2504.57 ccw(c4250.82,2521.67) 4272.22,2510.25 cw(c4250.82,2521.67) 4268.06,2504.61 ; 4745.11,358.7 cw(c4762.38,341.67) 4762.38,365.92 ccw(c4762.38,341.67) 4745.14,358.73 ; 4882.08,1906.16 ccw(c4867.99,1943.33) 4899.19,1918.71 ccw(c4867.99,1943.33) 4905.34,1929.75 ccw(c4867.99,1943.33) 4907.74,1943.33 ; 1919.14,1359.42 ccw(c1919.14,1391.67) 1941.92,1368.83 cw(c1919.14,1391.67) 1919.14,1359.42
  Bottom Layer w8.5: 2995.21,513.58 ccw(c3006.6,551.67) 3017.99,513.58 ; 3345.05,513.58 ccw(c3356.44,551.67) 3367.82,513.58 ; 3683.33,513.58 ccw(c3694.72,551.67) 3706.11,513.58 ; 4986.2,1876.44 cw(c4963.28,1853.75) 4995.53,1853.75 ccw(c4963.28,1853.75) 4986.2,1876.44
  other v1: 6123.76,56.67 6615.51,56.67 684.82,61.67 97.36,95 3483.5,256.67 3653.47,268.33 4694.72,330 5103.96,333.33 4077.56,336.67 4468.65,338.33 3856.44,340 3485.15,351.67 1023.1,560 3176.57,618.33 2846.54,623.33 2500,626.67 4189.77,663.33 4831.68,673.33 3268.56,680 3402.64,685 4686.47,698.33 4341.58,710 5148.52,726.67 4518.15,733.33 4881.19,926.67 4491.75,1151.67 1346.53,1221.67 4731.02,1228.33 5026.4,1230 3052.81,1233.33 3827.69,1251.67 2066.01,1348.33 4808.58,1396.67 1029,1425 1379.54,1446.67 1645.22,1463.33 2681.52,1473.33 4311.88,1501.67 5046.2,1535 3128.71,1536.67 4877.89,1536.67 4645.22,1586.67 4646.86,1633.33 3061.06,1648.33 2468.65,1700 4087.46,1705 5011.55,1710 3557.76,1730 4694.72,1751.67 1221,1766 3834.98,1865 5183.17,2043.33 3089.11,2046.67 2501.65,2050 4217.82,2050 2252.47,2055 2844.89,2066.67 3125.41,2081.67 4290.43,2131.67 2615.51,2186.67 1932.34,2228.33 5042.9,2238.33 5364.69,2256.67 4191.42,2368.33 4760.73,2370 3943.89,2376.67 2229.37,2395 3711.22,2408.33 2405.94,2428.33 3437.29,2430 2620.46,2441.67 1531.35,2461.67 2803.63,2480 3034.65,2481.67 744,2507 5308.58,2550 1742.57,2551.67 1041,2568 1036.3,2698.33 650,2743 714,2744 941,2750 1387.79,2771.67 767.33,3601.67 953.8,3605 1039.6,3606.67 866.34,3661.67 1305.28,3893.33 94.06,3978.33 169.97,3985 1297.03,3986.67
  other v3: 2464.51,1113.9
NewNet4: ?.165 pad.503 pad.504 | length 254.7
  Top Layer w14: ?.165@4711.22,1338.33 4752.48,1296.67 4815.18,1296.67 4863.04,1341.67 pad.504@4930.69,1341.67
NewNet5: ?.160 pad.0@1900.99,555 pad.0@2663.37,553.33 pad.0@3006.6,551.67 pad.0@3356.44,551.67 pad.0@3694.72,551.67 pad.0@4016.5,553.33 pad.0@4354.79,546.67 pad.0@4686.47,546.67 pad.0@4867.99,1943.33 pad.0@5036.3,546.67 pad.185 pad.186 pad.189 pad.190 pad.193 pad.194 pad.197 pad.198 pad.201 pad.202 pad.205 pad.206 pad.209 pad.210 pad.213 pad.214 pad.217 pad.218 pad.511 pad.677 pad.743 pad.744 pad.745 pad.746 pad.747 pad.748 pad.749 pad.750 pad.751 pad.752 pad.753 pad.754 pad.755 pad.756 pad.757 pad.758 pad.893 pad.909 pad.919 pad.920 pad.921 pad.945 | length 14750.8
  Top Layer w14: pad.186@1844.89,498.33 1925.74,498.33 1925.74,530 pad.0@1899.34,556.67 ; pad.217@4942.24,471.67 5028.05,471.67 5028.05,541.67 v1@5036.3,551.67
  Top Layer w15: pad.189@2603.96,476.67 2688.12,476.67 2688.12,523.33 v1@2655.12,556.67 ; pad.194@2947.2,471.67 3029.7,471.67 3029.7,533.33 pad.0@3011.55,551.67 ; pad.197@3275.58,476.67 3364.69,476.67 v1@3364.69,553.33 ; pad.201@3608.91,473.33 3693.07,473.33 v1@3693.07,546.67 ; pad.205@3948.85,473.33 4019.8,473.33 pad.0@4019.8,555 ; pad.209@4273.93,475 4353.14,475 4354.79,475 pad.0@4354.79,543.33 ; pad.213@4610.56,473.33 4684.82,473.33 pad.0@4684.82,546.67
  Top Layer w20: 4841.58,1908.33 pad.511@4929.04,1820
  Top Layer w30: ?.160@4830.03,1903.33 v1(4867.99,1943.33)
  Bottom Layer w30: pad.921@1596.95,247.5 1611.46,274 1892.33,545.83 pad.0@5033,545.83 ; pad.920@2297.44,246.67 2297.44,538.33 ; pad.909@2898.51,245.83 2898.51,535.83 ; pad.919@3757.43,243.33 3757.43,540.83 ; pad.893@4352.31,249.17 pad.0@4352.31,542.5 ; 4963.28,552.08 4963.28,1853.75 4882.01,1935.83 5128.71,2185 pad.753@5128.71,2619.17
  Bottom Layer w45: pad.945@1530.94,2643.33 1603.14,2716.25 6540.02,2716.25 pad.758@6620.46,2635 ; pad.743@1834.16,2630.83 1834.16,2710 ; pad.744@2131.6,2633.33 2131.6,2700.42 ; pad.745@2428.63,2641.67 2428.63,2707.08 ; pad.746@2727.72,2634.58 2727.72,2704.17 ; pad.747@3030.53,2638.75 3030.53,2704.17 ; pad.748@3323.02,2639.17 3323.02,2699.58 ; pad.749@3619.64,2640 3619.64,2703.33 ; pad.677@3925.74,2636.67 3925.74,2706.67 ; pad.750@4217.82,2639.17 4217.82,2703.33 ; pad.751@4526.4,2638.75 4526.4,2702.92 ; pad.752@4824.26,2639.58 4824.26,2704.17 ; pad.753@5117.57,2640 5117.57,2699.58 ; pad.754@5419.97,2640 5419.97,2702.5 ; pad.755@5714.52,2637.08 5714.52,2697.92 ; pad.756@6019.8,2639.58 6019.8,2703.33 ; pad.757@6318.07,2639.17 6318.07,2701.25
  other v1: 4354.79,546.67 4686.47,546.67 5036.3,546.67 3006.6,551.67 3356.44,551.67 3694.72,551.67 2663.37,553.33 4016.5,553.33 1900.99,555
NewNet6: ?.7 ?.84 ?.97 ?.103 ?.113 ?.119 ?.137 ?.143 ?.146 ?.151 ?.155 ?.157 ?.161 Designator32.1 Designator36.2@614,2204 Designator38.1 Designator40.1@1085,1825 pad.0@1785.48,2453.33 pad.0@1904.29,2451.67 pad.0@2698.02,2016.67 pad.0@4506.6,1936.67 pad.0@4696.37,2131.67 pad.0@4858.09,1768.33 pad.0@5222.77,638.33 pad.0@5264.03,2130 pad.0@5599.01,1163.33 pad.0@5615.51,821.67 pad.0@5663.37,1616.67 pad.0@6605.61,1860 pad.169 pad.263 pad.286 pad.422 pad.427 pad.429 pad.441 pad.443 pad.444 pad.500 pad.510 pad.516 pad.517 pad.519 pad.520 pad.538 pad.546 pad.579 pad.580 pad.581 pad.582 pad.583 pad.584 pad.585 pad.609 pad.625 pad.816 pad.817 pad.832 pad.922 pad.924 pad.935 | length 23527.3
  Top Layer w12: ?.84@4018.15,1953.33 4018.15,2111.67 4052.81,2146.67 4052.81,2216.67 4047.86,2221.67 pad.520@4047.86,2148.33 ; pad.519@4024.75,2086.67 pad.519@4037.95,2086.67
  Top Layer w14: pad.609@797.03,3020 757.43,2980.4 757.43,2918.33 784.26,2890 793.73,2880 ?.146@816.83,2880 ; ?.143@2082.51,2366.67 2082.51,2453.33 ; 2242.57,1521.67 2242.57,1296.67 pad.427@2267.33,1296.67 ; pad.443@2277.23,1083.33 2277.23,1180 2290.43,1180 pad.427@2290.43,1296.67 ; pad.443@2282.18,1078.33 2252.47,1078.33 2219.47,1045 2219.47,951.67 2252.47,918.33 pad.444@2283.83,918.33 ; ?.119@2726.07,2145 2726.07,2101.67 2770.63,2056.67 2770.63,2016.67 ; pad.263@3033,1483.33 3061.06,1456.67 ?.7@3061.06,1336.67 ; pad.500@4547.86,1315 4547.86,1241.67 4625.41,1163.33 pad.0@5594.06,1163.33 ; ?.97@5194.72,2131.67 5194.72,2173.33 5206.27,2186.67 pad.517@5262.38,2186.67 ; v1(5264.03,2130) pad.517@5264.03,2186.67
  Top Layer w20: pad.286@1641.91,2393.33 1782.18,2393.33 pad.0@1782.18,2451.67 ; pad.816@2740.92,1495 2744.22,1490 2757.43,1503.33 2757.43,1508.33 2795.38,1546.67 3009.9,1546.67 3034.65,1521.67 pad.263@3034.65,1488.33 ; pad.516@4458.78,1893.33 pad.169@4554.46,1893.33 ; 4506.6,1894.24 v1(4506.6,1936.67) ; 5009.9,1773.33 5009.9,1818.33 5018.15,1818.33 5018.15,1771.67 ; v1(5222.77,638.33) 5268.98,592.13 pad.422@5268.98,566.67
  Top Layer w30: 534.33,1435 Designator32.1@613,1435 ; 542.9,1705 965,1705 Designator40.1@1085,1825 ; 544.69,2204 Designator36.2@614,2204 ; pad.924@612.21,1150 531.35,1230.86 531.35,2718.35 613.86,2800.86 613.86,2820 712,2820 782,2890 784.26,2890 ?.146@816.83,2890 ; pad.922@1810.23,1391.67 1919.14,1391.67 2051.16,1523.33 2711.22,1523.33 pad.816@2740.92,1495 ; v1@1909.24,2453.33 2260.73,2453.33 2691.42,2016.67 2981.85,2016.67 3026.4,2061.67 ?.113@3026.4,2106.67 ; pad.538@2572.61,1645 pad.817@2666.03,1645 ; ?.113@3031.35,2143.33 3118.81,2143.33 3199.67,2225 4603.96,2225 4698.02,2131.67 4790.43,2223.33 4851.48,2223.33 4891.09,2183.33 ; v1(4858.09,1768.33) ?.161@4858.09,1816.67 ; v1@4863.04,1766.67 5036.3,1766.67 5077.56,1725 5145.22,1725 5181.52,1761.67 5551.15,1761.67 5618.81,1691.67 pad.935@5618.81,1650 ; ?.157@4988.45,1591.67 5034.65,1591.67 5087.46,1643.33 5087.46,1718.33
  Top Layer w50: pad.924@613.86,1141.67 657.52,1141.67 747.52,1051.67 782.18,1051.67 782.18,531.67 836.63,476.67 1130.36,476.67 1541.25,61.67 5839.93,61.67 5971.95,195 5971.95,306.67 5892.74,385 5892.74,541.67 v1(5615.51,821.67)
  Top Layer w80: pad.935@5627.06,1626.67 6409.24,1626.67 6612.21,1831.67 6612.21,1886.67 pad.546@6759.08,1886.67
  Bottom Layer w15: v1@5268.98,2131.67 5268.98,2049.17 5628.3,1686.25 pad.935@5628.3,1645.83
  Bottom Layer w30: pad.0@1788.37,2454.17 pad.0@1902.23,2454.17 ; v1(2698.02,2016.67) 2684.82,2016.67 2684.82,1558.33 pad.816@2751.65,1490.83 ; v1@4510.73,1930.42 4700.91,1930.42 pad.0@4860.56,1769.17 ; 4697.19,1938.33 pad.0@4697.19,2132.5 ; v1@5235.56,629.58 5443.89,629.58 v1@5620.05,807.5
  Bottom Layer w50: v1@5630.36,817.92 pad.935@5630.36,1595
  other v1: 5599.01,1163.33 5663.37,1616.67 6605.61,1860 4696.37,2131.67 1904.29,2451.67 1785.48,2453.33
NewNet7: ?.162 pad.512 | length 57.8
  Top Layer w14: pad.512@4724.42,1826.67 ?.162@4782.18,1826.67
NewNet8: ?.89 ?.158 pad.176 | length 159.2
  Top Layer w15: ?.89@4801.98,1720 4821.78,1720 4874.59,1666.67 ?.158@4938.94,1666.67
NewNet9: ?.154 pad.0@5122.11,1533.33 pad.944 | length 443.9
  Top Layer w14: pad.0@5123.76,1533.33 ?.154@5123.76,1595
  Bottom Layer w15: pad.0@5124.59,1532.08 5363.04,1291.25 pad.944@5406.35,1291.25
  other v1: 5122.11,1533.33
NewNet10: ?.156 pad.175 | length 64.4
  Top Layer w14: ?.156@5155.12,1671.67 pad.175@5219.47,1671.67
NewNet11: ?.41 ?.74 ?.152 pad.0@2858.09,1135 pad.0@3638.61,1745 pad.246 pad.426 | length 1843.4
  Top Layer w14: pad.246@2358.09,1370 2358.09,1213.33 2567.66,1213.33 2643.56,1136.67 ?.41@2787.13,1136.67 ; ?.41@2777.23,1140 v1@2858.09,1140 ; pad.0@3635.31,1746.67 3666.67,1776.67 ?.74@3735.97,1776.67
  Bottom Layer w15: v1@2862.21,1127.5 3028.88,1127.5 pad.0@3637.79,1742.5
  other v1: 2858.09,1135 3638.61,1745
NewNet12: ?.148 Designator41.1 | length 214.3
  Top Layer w30: Designator41.1@624,2659 717,2659 751.33,2693.33 776.9,2693.33 ?.148@810.23,2726.67
NewNet13: ?.150 pad.599 | length 286.2
  Top Layer w14: ?.150@896.04,2683.33 952.14,2683.33 986.8,2720 986.8,2803.33 968.65,2823.33 pad.599@899.34,2823.33
NewNet14: ?.145 pad.600 | length 114
  Top Layer w14: pad.600@833.33,2836.67 833.33,2845.33 899.34,2911.34 ?.145@899.34,2923.33
NewNet15: ?.147 pad.314 pad.590 | length 219.2
  Top Layer w14: ?.147@816.83,2968.33 851.49,2968.33 869.64,2986.67 869.64,3023.33 pad.590@991.75,3023.33
NewNet16: ?.130 pad.280 | length 531.5
  Top Layer w14: pad.280@1643.57,1961.67 1952.14,1961.67 2080.86,2091.67 ?.130@2080.86,2131.67
NewNet17: ?.131 pad.281 | length 502
  Top Layer w14: pad.281@1632.01,2035 1679.87,2035 1722.77,1991.67 1919.14,1991.67 2033,2106.67 ?.131@2033,2141.67
NewNet18: ?.132 pad.282 | length 419.5
  Top Layer w14: pad.282@1636.96,2105 1656.77,2105 1742.57,2018.33 1896.04,2018.33 ?.132@1983.5,2106.67
NewNet19: ?.133 pad.283 | length 446
  Top Layer w14: pad.283@1632.01,2173.33 1689.77,2173.33 1712.87,2148.33 1712.87,2090 1757.43,2045 1874.59,2045 1932.34,2103.33 ?.133@1932.34,2136.67
NewNet20: ?.134 pad.284 | length 397.8
  Top Layer w14: pad.284@1641.91,2246.67 1712.87,2246.67 1740.92,2216.67 1740.92,2108.33 1772.28,2076.67 1846.54,2076.67 ?.134@1887.79,2118.33
NewNet21: ?.135 pad.285 | length 330.8
  Top Layer w14: pad.285@1640.26,2298.33 1671.62,2298.33 1801.98,2298.33 1833.33,2265 ?.135@1833.33,2141.67
NewNet22: ?.136 pad.0@1663.37,2471.67 pad.0@1787.13,2250 pad.304 | length 434.1
  Top Layer w14: ?.136@1787.13,2136.67 pad.0@1787.13,2251.67
  Top Layer w20: pad.0@1661.72,2470 pad.304@1661.72,2518.33
  Bottom Layer w15: pad.0@1663.37,2470 1790.84,2341.25 pad.0@1790.84,2251.67
  other v1: 1787.13,2250 1663.37,2471.67
NewNet23: ?.138 pad.566 | length 206.1
  Top Layer w14: ?.138@1834.98,2356.67 1834.98,2510 pad.566@1872.94,2546.67
NewNet24: ?.120 ?.139 pad.0@1886.14,2281.67 pad.0@2584.16,2341.67 | length 1022.6
  Top Layer w14: pad.0@1882.84,2285 ?.139@1882.84,2361.67 ; v1@2585.81,2333.33 2673.27,2246.67 ?.120@2673.27,2143.33
  Bottom Layer w15: pad.0@1885.31,2282.08 1940.18,2337.5 pad.0@2581.68,2337.5
  other v1: 1886.14,2281.67 2584.16,2341.67
NewNet25: ?.46 ?.101 ?.117 ?.141 pad.0@1973.6,2285 pad.0@2839.93,2286.67 pad.0@4985.15,2286.67 | length 4343.3
  Top Layer w14: v1@1975.25,2290 1983.5,2300 ?.141@1983.5,2363.33 ; ?.117@2821.78,2148.33 2821.78,2260 v1@2846.54,2286.67 ; ?.46@4247.52,1840 4293.73,1840 4305.28,1851.67 4305.28,1961.67 4392.74,2050 4947.19,2050 4995.05,2096.67 ?.101@4995.05,2141.67 ; ?.101@4993.4,2146.67 v1@4993.4,2293.33
  Bottom Layer w15: pad.0@1977.31,2286.67 pad.0@4986.39,2286.67
  other v1: 1973.6,2285 2839.93,2286.67 4985.15,2286.67
NewNet26: ?.45 ?.102 ?.118 ?.142 pad.0@2042.9,2240 pad.0@2770.63,2236.67 pad.0@4932.34,2241.67 | length 4087.7
  Top Layer w14: ?.142@2033,2351.67 2033,2246.67 v1@2037.95,2243.33 ; ?.118@2777.23,2140 v1@2777.23,2231.67 ; ?.45@4234.32,1873.33 4234.32,1975 4339.93,2081.67 4925.74,2081.67 4942.24,2098.33 v1@4942.24,2238.33
  Bottom Layer w15: pad.0@2043.32,2238.75 v1@4927.39,2238.75
  other v1: 2770.63,2236.67 2042.9,2240 4932.34,2241.67
NewNet27: ?.114 pad.558 | length 1466.9
  Top Layer w14: ?.114@2976.9,2151.67 2976.9,2180 3105.61,2311.67 4042.9,2311.67 4250.82,2521.67 pad.558@4250.82,2543.33
NewNet28: ?.104 ?.115 pad.0@2927.39,2080 pad.0@4797.03,2141.67 | length 2025.3
  Top Layer w14: v1@4803.63,2145 ?.104@4839.93,2145
  Top Layer w20: pad.0@2924.75,2080.73 ?.115@2924.75,2143.33
  Bottom Layer w15: v1@2939.36,2075.42 3053.22,2190.42 4746.29,2190.42 pad.0@4796.62,2139.58
  other v1: 2927.39,2080 4797.03,2141.67
NewNet29: ?.122 pad.302 | length 519.8
  Top Layer w14: pad.302@2311.88,2546.67 2348.18,2546.67 2394.39,2500 2633.66,2500 2724.42,2406.67 ?.122@2724.42,2358.33
NewNet30: ?.123 pad.301 | length 293.5
  Top Layer w14: pad.301@2592.41,2550 2660.07,2550 2775.58,2433.33 ?.123@2775.58,2371.67
NewNet31: ?.124 pad.300 | length 213
  Top Layer w14: ?.124@2823.43,2366.67 2823.43,2430 2892.74,2501.67 pad.300@2892.74,2551.67
NewNet32: ?.125 pad.562 | length 290.9
  Top Layer w14: ?.125@2874.59,2368.33 2874.59,2403.33 3024.75,2556.67 pad.562@3066.01,2556.67
NewNet33: ?.126 pad.561 | length 558.2
  Top Layer w14: ?.126@2922.44,2360 2922.44,2403.33 2952.14,2433.33 3265.68,2433.33 3351.49,2518.33 pad.561@3351.49,2556.67
NewNet34: ?.127 pad.559 | length 1147.5
  Top Layer w14: ?.127@2976.9,2360 2976.9,2318.33 2998.35,2296.67 3046.2,2296.67 3085.81,2338.33 3772.28,2338.33 3952.15,2521.67 pad.559@3952.15,2548.33
NewNet35: ?.128 pad.560 | length 714.9
  Top Layer w14: ?.128@3024.75,2363.33 3500,2363.33 3636.96,2501.67 pad.560@3636.96,2546.67
NewNet36: ?.98 pad.550 | length 757.2
  Top Layer w14: ?.98@5143.56,2141.67 5143.56,2226.67 5242.57,2325 5638.61,2325 5684.82,2371.67 pad.550@5755.78,2371.67
NewNet37: ?.47 ?.99 | length 1067.2
  Top Layer w14: ?.47@4232.67,1806.67 4298.68,1806.67 4334.98,1845 4334.98,1943.33 4412.54,2021.67 5006.6,2021.67 5092.41,2106.67 ?.99@5092.41,2131.67
NewNet38: ?.106 pad.294 | length 318
  Top Layer w14: pad.294@4674.92,2541.67 4765.68,2541.67 4892.74,2413.33 ?.106@4892.74,2366.67
NewNet39: ?.107 pad.293 | length 204
  Top Layer w14: ?.107@4942.24,2351.67 4942.24,2443.33 4988.45,2490 pad.293@4988.45,2536.67
NewNet40: ?.108 pad.555 | length 273.3
  Top Layer w14: ?.108@4996.7,2361.67 4996.7,2428.33 5112.21,2546.67 pad.555@5153.47,2546.67
NewNet41: ?.109 pad.554 | length 516
  Top Layer w14: ?.109@5037.95,2355 5037.95,2391.67 5143.56,2496.67 5344.89,2496.67 5392.74,2545 pad.554@5453.8,2545
NewNet42: ?.110 pad.553 | length 758.1
  Top Layer w14: ?.110@5094.06,2360 5094.06,2396.67 5165.02,2468.33 5605.61,2468.33 5683.17,2545 pad.553@5754.12,2545
NewNet43: ?.111 pad.552 | length 354.4
  Top Layer w14: ?.111@5141.91,2365 5141.91,2396.67 5171.62,2426.67 pad.552@5452.15,2426.67
NewNet44: ?.112 pad.551 | length 579.6
  Top Layer w14: ?.112@5202.97,2361.67 5602.31,2361.67 5681.52,2441.67 pad.551@5749.18,2441.67
NewNet45: ?.91 pad.513 | length 312.6
  Top Layer w14: pad.513@4636.96,1825 4636.96,1706.67 4726.07,1616.67 ?.91@4793.73,1616.67
NewNet46: ?.92 pad.437 | length 413.5
  Top Layer w14: pad.437@4476.9,1638.33 4476.9,1571.67 4526.4,1521.67 4702.97,1521.67 4749.18,1570 ?.92@4782.18,1570
NewNet47: ?.49 pad.0@4422.44,1760 pad.0@4544.56,1775 pad.170 pad.514 | length 477.6
  Top Layer w14: ?.49@4239.27,1743.33 4420.79,1743.33 v1@4420.79,1768.33 ; pad.0@4546.2,1773.33 pad.514@4546.2,1828.33 ; pad.514@4557.76,1818.33 pad.170@4618.81,1881.67
  Bottom Layer w15.75: pad.0@4423.27,1758.33 4529.7,1758.33 pad.0@4544.97,1773.75
  other v1: 4422.44,1760 4544.56,1775
NewNet48: ?.50 pad.174 pad.515 | length 366.7
  Top Layer w14: ?.50@4229.37,1713.33 4475.25,1713.33 4475.25,1808.33 pad.515@4457.1,1826.67
NewNet49: ?.51 pad.508 | length 1138.5
  Top Layer w14: ?.51@4237.62,1680 4321.78,1680 4511.55,1488.33 5181.52,1488.33 5221.12,1528.33 pad.508@5221.12,1586.67
NewNet50: ?.53 pad.180 | length 515.9
  Top Layer w14: ?.53@4232.67,1620 4331.68,1620 4486.8,1461.67 4613.86,1461.67 4633.66,1441.67 pad.180@4633.66,1401.67
NewNet51: ?.54 pad.181 | length 320.8
  Top Layer w14: ?.54@4232.67,1586.67 4323.43,1586.67 4465.35,1443.33 pad.181@4465.35,1415
NewNet52: ?.55 pad.0@1506.6,945 pad.0@4148.52,1556.67 pad.253 | length 3480.4
  Top Layer w14: pad.253@1085.81,991.67 1118.81,991.67 1166.67,943.33 pad.0@1506.6,943.33 ; v1@4143.56,1555 ?.55@4222.77,1555
  Bottom Layer w15: pad.0@1507.01,943.33 1837.87,943.33 1918.73,861.67 3161.3,861.67 3845.71,1552.92 v1@4144.8,1552.92
  other v1: 1506.6,945 4148.52,1556.67
NewNet53: ?.56 pad.0@1506.6,880 pad.0@4191.42,1471.67 pad.252 | length 3464.8
  Top Layer w14: pad.252@1089.11,923.33 1122.11,923.33 1161.72,883.33 pad.0@1503.3,883.33 ; ?.56@4143.56,1468.33 pad.0@4188.12,1468.33
  Bottom Layer w15: pad.0@1510.73,880.83 1833.33,880.83 1882.43,831.25 3180.69,831.25 3837.46,1494.58 4168.73,1494.58 pad.0@4192.66,1470.42
  other v1: 1506.6,880 4191.42,1471.67
NewNet54: ?.57 pad.0@962.05,846.67 pad.0@1504.95,815 pad.0@4183.17,1398.33 pad.251 pad.257 pad.576 pad.838 | length 4122.8
  Top Layer w14: pad.257@859.74,851.67 1118.81,851.67 1153.47,816.67 pad.0@1501.65,816.67 ; ?.57@4112.21,1463.33 4112.21,1411.67 4123.76,1400 v1@4176.57,1400
  Bottom Layer w15: pad.838@613.04,848.33 pad.0@959.16,848.33 ; pad.0@1505.78,814.17 1827.97,814.17 1844.47,797.5 3185.23,797.5 3848.6,1467.5 4133.25,1467.5 4182.76,1417.5 pad.0@4182.76,1402.5
  other v1: 1504.95,815 962.05,846.67 4183.17,1398.33